# EAGLE board relay (tugas nanang) (EAGLE 7.5.0)
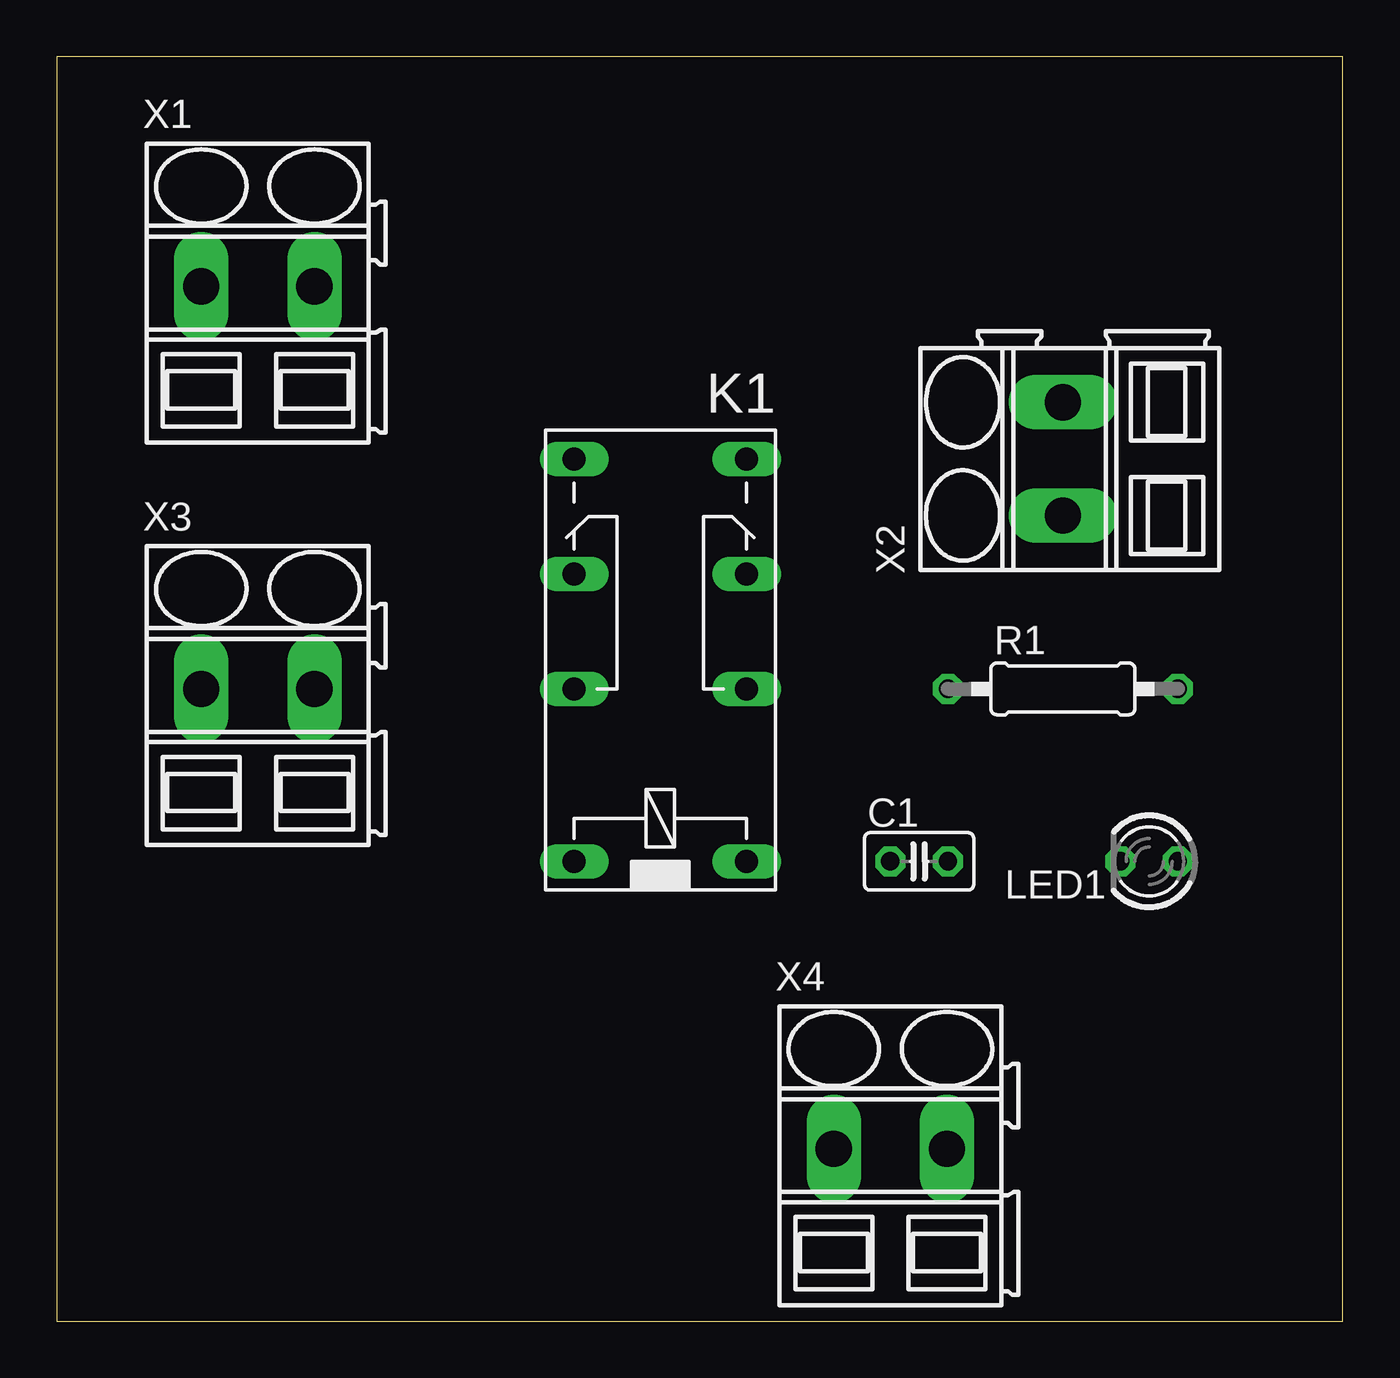
[diagram p0: board, top side]
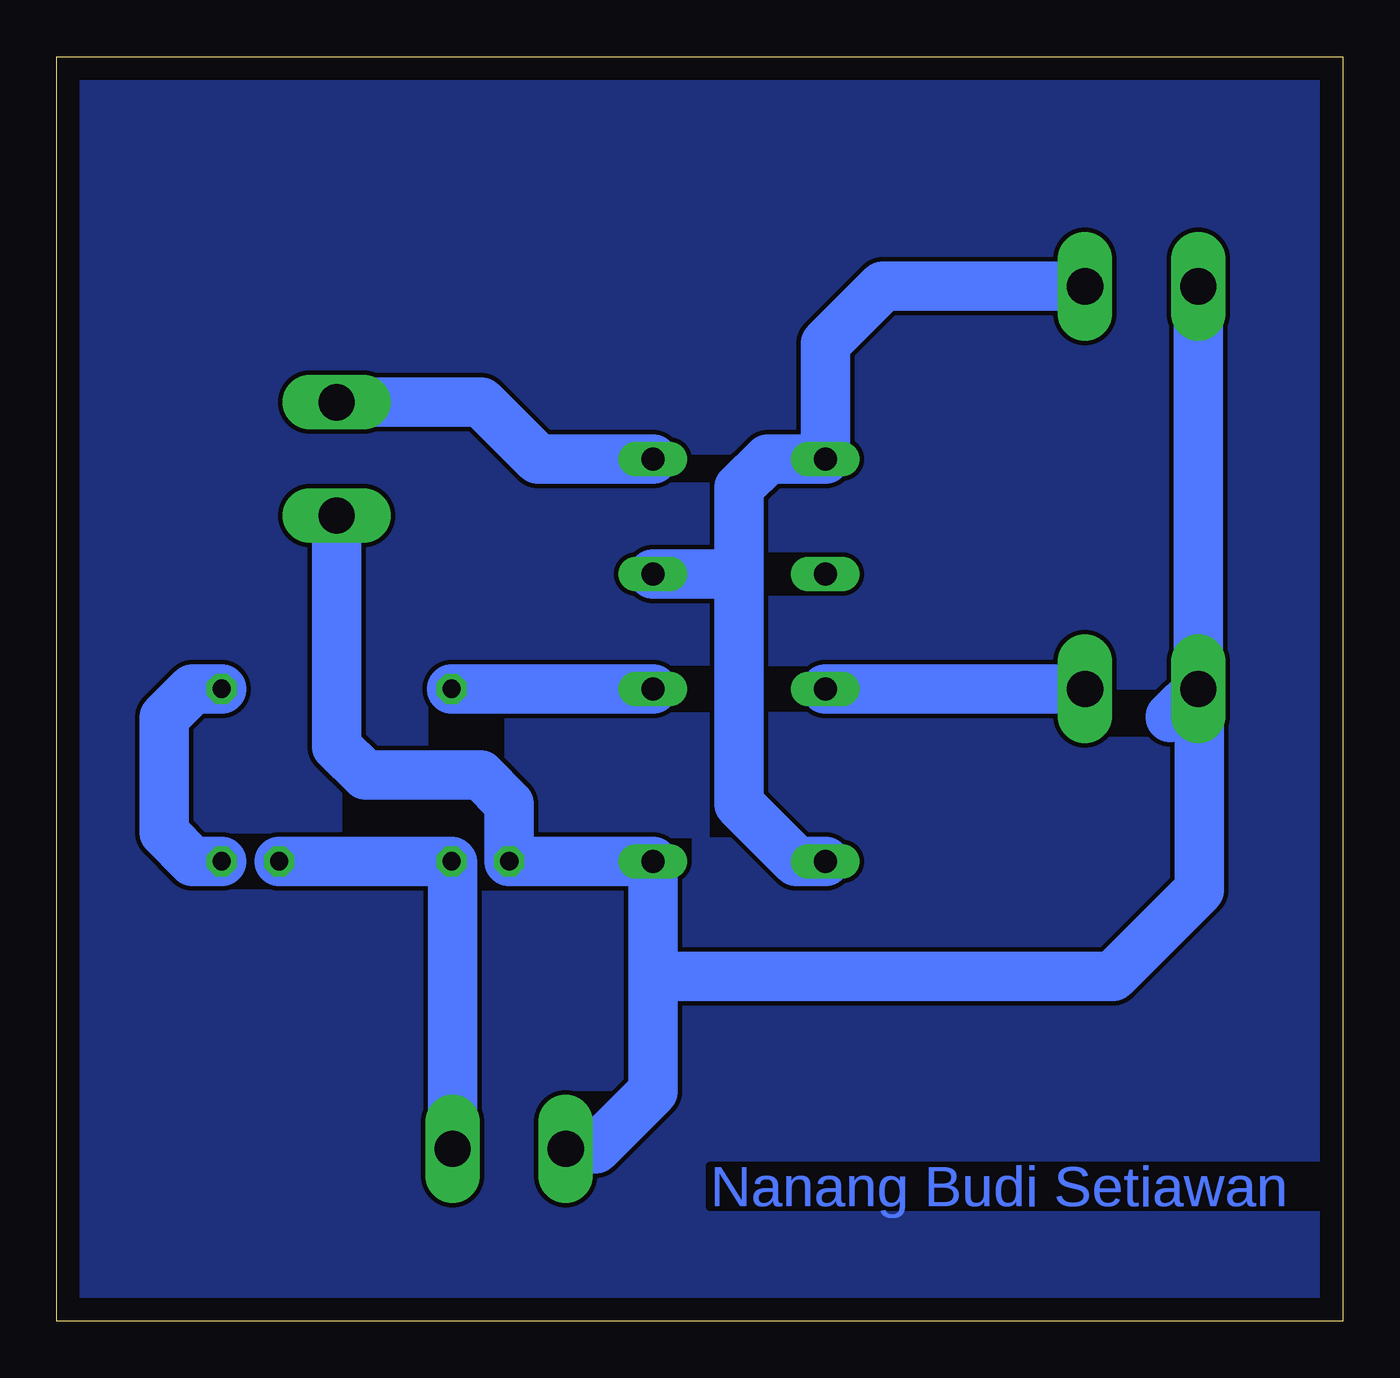
[diagram p1: board, bottom side, seen from below]

Size 56.82 x 55.87 mm. Coordinates in mm from the lower left corner, seen from the top.
Outline: 0,0 56.82,0 56.82,55.87 0,55.87 0,0
Copper layers (1*16): Top 0.035mm / dielectric 1.5mm / Bottom 0.035mm
Design rules "default": minimum track width 10mil, minimum drill 24mil, track to track 8mil, track to pad 8mil, pad to pad 8mil, via to via 8mil, smd to smd 8mil, copper to edge 40mil, drill to drill 8mil, minimum pad ring 10mil, minimum via ring 8mil, stop-mask expansion 4mil, vias tented up to drill 0mil, thermal gap 10mil

## Footprints (pad centres in the part's own frame; a part is rotated, then mirrored left to right if it is on the bottom)
C025-025X050 = drill 0.813 octagon: 1 -1.27,0; 2 1.27,0
351 = drill 1.016 long: 1 -3.81,-3.81; 16 -3.81,3.81; O1 8.89,-3.81; O2 8.89,3.81; P1 3.81,-3.81; P2 3.81,3.81; S1 13.97,-3.81; S2 13.97,3.81
LED3MM = drill 0.813 octagon: A -1.27,0; K 1.27,0
0207/10 = drill 0.813 octagon: 1 -5.08,0; 2 5.08,0
SMKDSP_1,5/2 = drill 1.6 pad 1.8 long: 1 -2.5,0; 2 2.5,0

## Placement (x,y rotation side)
C1  [C025-025X050]  38.1,20.32 0 top
K1  351  [351]  26.67,24.13 90 top
LED1  [LED3MM]  48.26,20.32 180 top
R1  [0207/10]  44.45,27.94 0 top
X1  SMKDSP_1,5/2  [SMKDSP_1,5/2]  8.89,45.72 0 top
X2  SMKDSP_1,5/2  [SMKDSP_1,5/2]  44.45,38.1 90 top
X3  SMKDSP_1,5/2  [SMKDSP_1,5/2]  8.89,27.94 0 top
X4  SMKDSP_1,5/2  [SMKDSP_1,5/2]  36.83,7.62 0 top

## Library data of the parts
C1 = rcl; SPICEPREFIX: C
K1 = relay; OC_FARNELL: unknown; OC_NEWARK: unknown
LED1 = led
R1 = rcl; SPICEPREFIX: R
X1-X4 = con-phoenix-smkdsp; MF: FARNELL; MPN: 1733570; OC_FARNELL: 3041244; OC_NEWARK: 69C8588

## Nets
GND: C1.1 K1.1 X1.1 X2.1 X3.1 X4.1
N$1: K1.P1 R1.1
N$2: LED1.A R1.2
O1: K1.S1 X2.2
P2: K1.P2 X3.2
S12: K1.16 K1.O1 K1.S2 X1.2
VOUT: C1.2 LED1.K X4.2

## Tracks (layer width: path | path; a pad name or v marks a point on that pad's centre or on a via)
GND
  Bottom 2.184: 6.35,45.72 X1.1 X3.1 | X4.1 33.02,7.62 30.48,10.16 30.48,15.24 | 30.48,15.24 K1.1 C1.1 36.83,22.86 38.1,24.13 43.18,24.13 44.45,25.4 X2.1 | X3.1 6.39,27.9 7.62,26.67 7.62,26.71 X3.1 | X3.1 6.35,27.94 6.35,19.05 10.16,15.24 30.48,15.24
N$1
  Bottom 2.184: K1.P1 R1.1
N$2
  Bottom 2.184: LED1.A 50.8,20.32 52.07,21.59 52.07,26.67 50.8,27.94 R1.2
N$3
  pour Bottom: 0,55.88 57.15,55.88 57.15,1.27 0,1.27
O1
  Bottom 2.184: X2.2 38.06,40.6 35.56,38.1 K1.S1
P2
  Bottom 2.184: X3.2 K1.P2
S12
  Bottom 2.184: X1.2 20.32,45.72 22.86,43.18 K1.S2 25.4,38.1 26.67,36.83 26.67,33.02 | 26.67,33.02 K1.O1 | K1.16 24.13,20.32 26.67,22.86 26.67,33.02
VOUT
  Bottom 2.184: X4.2 39.33,20.28 C1.2 LED1.K

## Text on the board
Bottom: Nanang Budi Setiawan | Nanang Budi Setiawan